# Altium PCB divisor.PcbDoc
Units mm, origin at the board's own origin, x right, y up, seen from the top; angles counter-clockwise.
Board outline 152.4 x 101.6 mm, 2 copper layers (Top Layer, Bottom Layer); 113 components, 230 nets, 687 pads, 101 vias.
Unrouted connection lines stored in the file: 281.
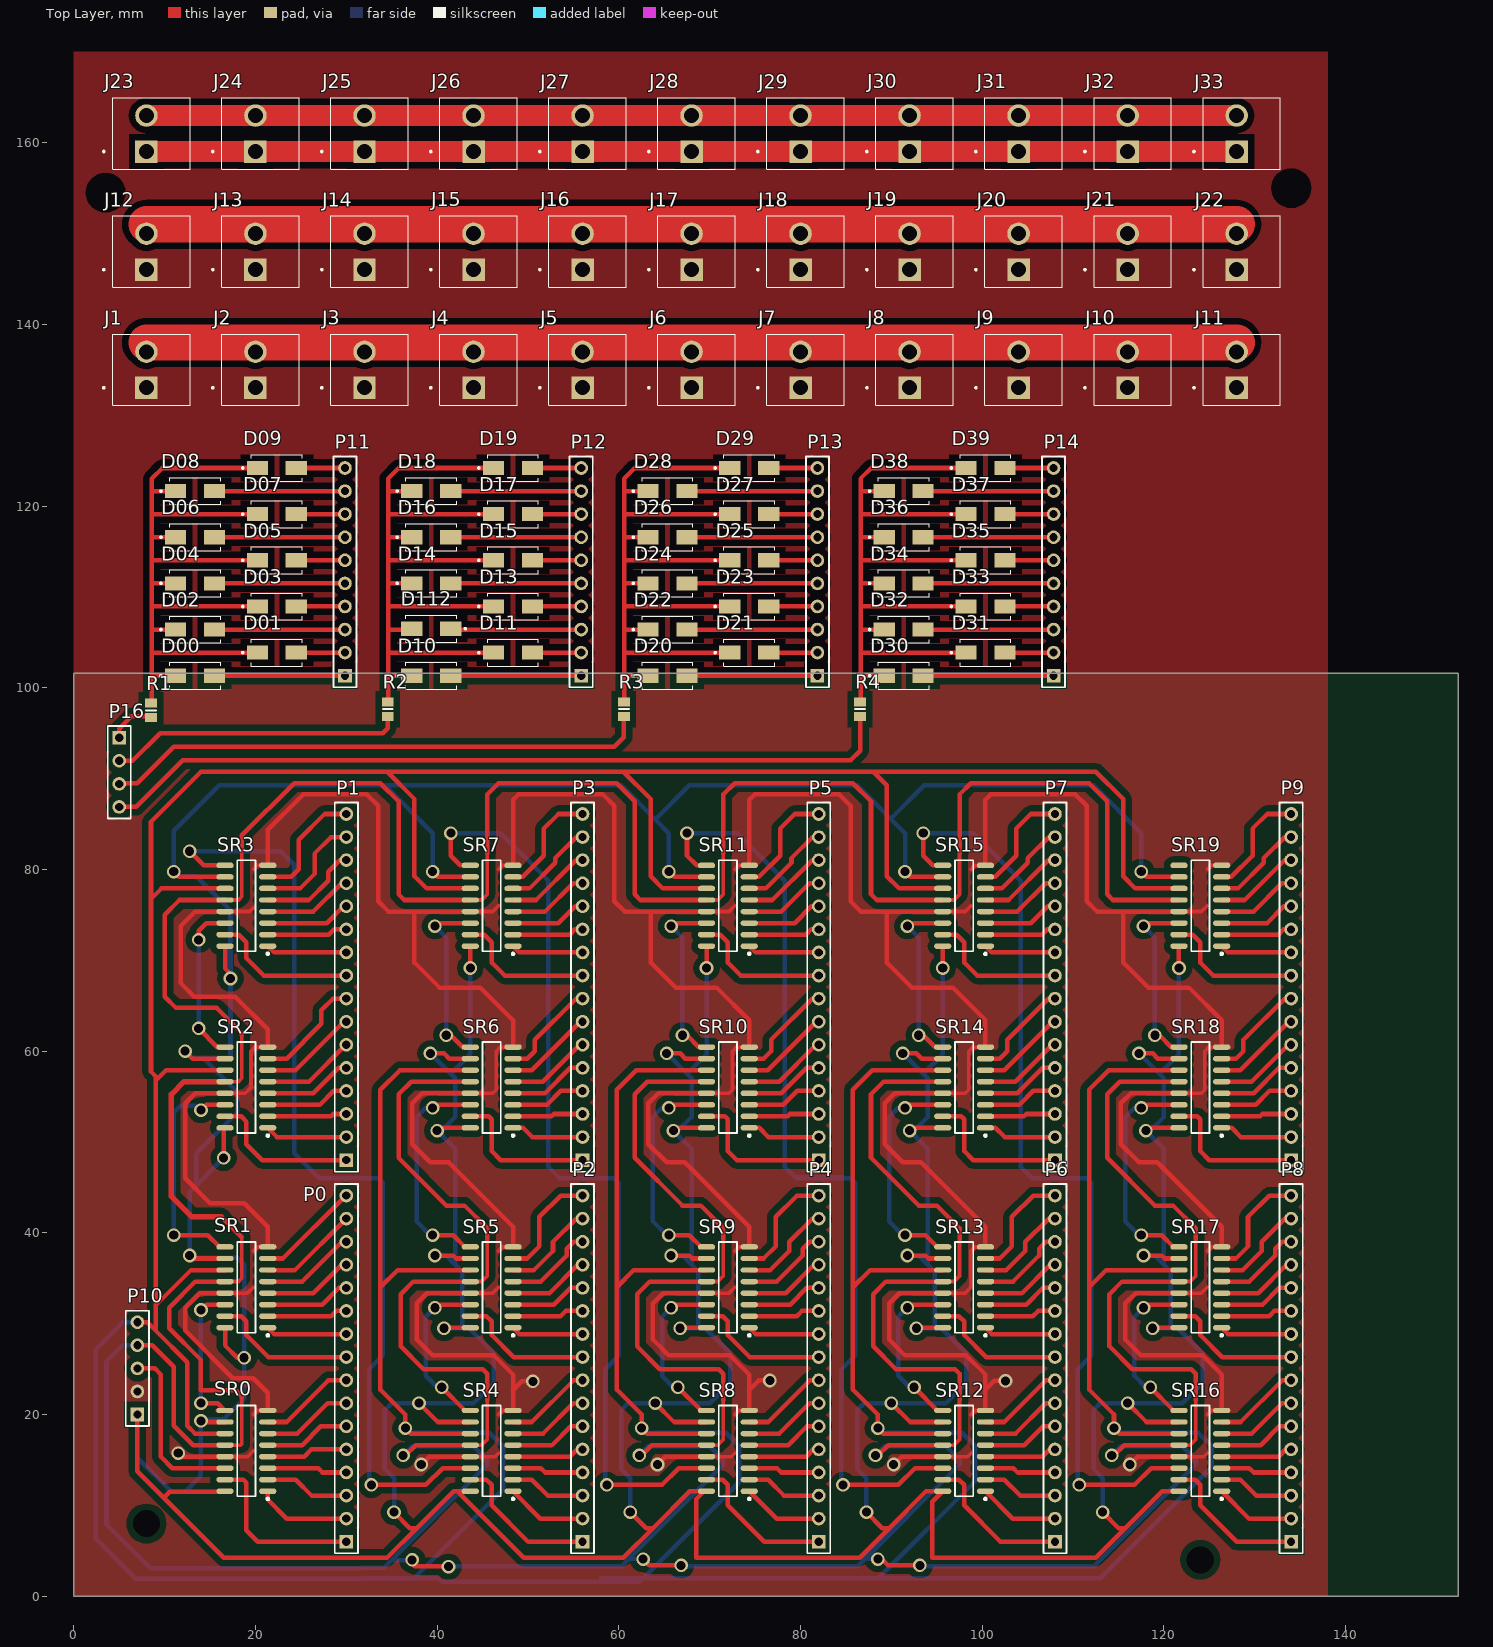
[diagram p0: Top Layer view]
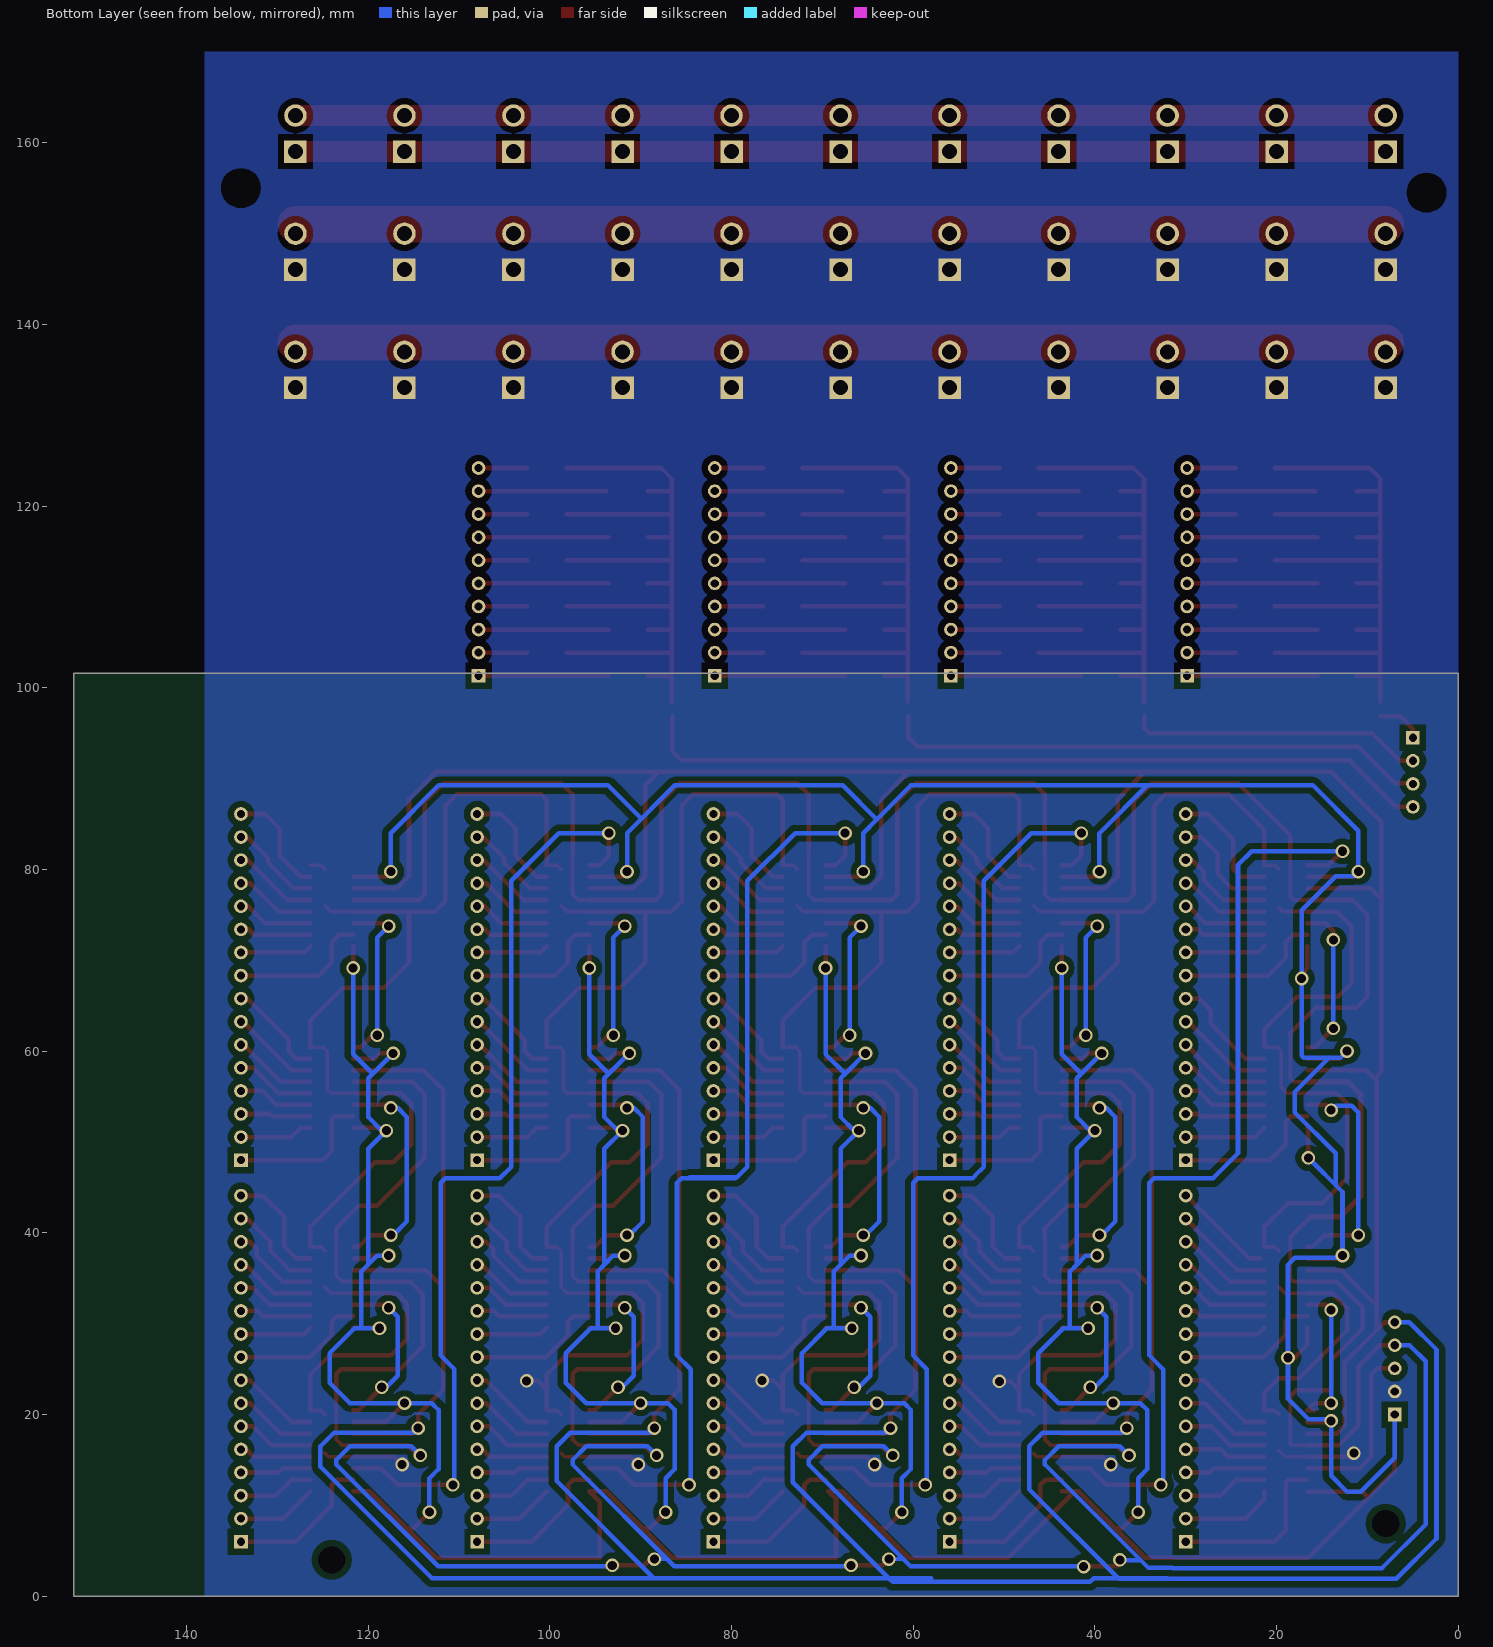
[diagram p1: Bottom Layer view, seen from below]

## Layer stack, top to bottom
Top Solder: solder mask 0.0102, Solder Resist, Dk 3.5
Top Layer: signal copper 0.0356
Dielectric 1: dielectric 0.32, FR-4, Dk 4.8
Bottom Layer: signal copper 0.0356
Bottom Solder: solder mask 0.0102, Solder Resist, Dk 3.5

## Board outline
0,0 152.4,0 152.4,101.6 0,101.6

## Design rules (kind name [scope] priority, off if disabled: settings)
Clearance [All] p1: gap=0.68 ignorepadtopadclearanceinfootprint=FALSE
PolygonConnect [All] p1: connectstyle=Direct reliefconductorwidth=0.254 reliefentries=4 polygonreliefangle="90 Angle" airgapwidth=0.254
RoutingVias [All] p1: holewidth=0.711 width=1.27 viastyle="Through Hole" minholewidth=0.711 minwidth=1.27 maxholewidth=0.711 maxwidth=1.27
SolderMaskExpansion [All] p1: expansion=0.102
Width [All] p1: maxlimit=0.254 minlimit=0.254 preferedwidth=0.254
30 further rules are at their usual default settings.

## Components (designator, comment, footprint, x,y, rotation, side; value= is the part's Value field where it differs from the comment)
D00 "SM120A" *DIOM5227X270N_S1M(Primary) 13.35,101.325 r0 top
D01 "SM120A" *DIOM5227X270N_S1M(Primary) 22.35,103.865 r0 top
D02 "SM120A" *DIOM5227X270N_S1M(Primary) 13.35,106.405 r0 top
D03 "SM120A" *DIOM5227X270N_S1M(Primary) 22.35,108.945 r0 top
D04 "SM120A" *DIOM5227X270N_S1M(Primary) 13.35,111.485 r0 top
D05 "SM120A" *DIOM5227X270N_S1M(Primary) 22.35,114.025 r0 top
D06 "SM120A" *DIOM5227X270N_S1M(Primary) 13.35,116.565 r0 top
D07 "SM120A" *DIOM5227X270N_S1M(Primary) 22.35,119.105 r0 top
D08 "SM120A" *DIOM5227X270N_S1M(Primary) 13.35,121.645 r0 top
D09 "SM120A" *DIOM5227X270N_S1M(Primary) 22.35,124.185 r0 top
D10 "SM120A" *DIOM5227X270N_S1M(Primary) 39.35,101.325 r0 top
D11 "SM120A" *DIOM5227X270N_S1M(Primary) 48.35,103.865 r0 top
D13 "SM120A" *DIOM5227X270N_S1M(Primary) 48.35,108.945 r0 top
D14 "SM120A" *DIOM5227X270N_S1M(Primary) 39.35,111.485 r0 top
D15 "SM120A" *DIOM5227X270N_S1M(Primary) 48.35,114.025 r0 top
D16 "SM120A" *DIOM5227X270N_S1M(Primary) 39.35,116.565 r0 top
D17 "SM120A" *DIOM5227X270N_S1M(Primary) 48.35,119.105 r0 top
D18 "SM120A" *DIOM5227X270N_S1M(Primary) 39.35,121.645 r0 top
D19 "SM120A" *DIOM5227X270N_S1M(Primary) 48.35,124.185 r0 top
D20 "SM120A" *DIOM5227X270N_S1M(Primary) 65.35,101.325 r0 top
D21 "SM120A" *DIOM5227X270N_S1M(Primary) 74.35,103.865 r0 top
D22 "SM120A" *DIOM5227X270N_S1M(Primary) 65.35,106.405 r0 top
D23 "SM120A" *DIOM5227X270N_S1M(Primary) 74.35,108.945 r0 top
D24 "SM120A" *DIOM5227X270N_S1M(Primary) 65.35,111.485 r0 top
D25 "SM120A" *DIOM5227X270N_S1M(Primary) 74.35,114.025 r0 top
D26 "SM120A" *DIOM5227X270N_S1M(Primary) 65.35,116.565 r0 top
D27 "SM120A" *DIOM5227X270N_S1M(Primary) 74.35,119.105 r0 top
D28 "SM120A" *DIOM5227X270N_S1M(Primary) 65.35,121.645 r0 top
D29 "SM120A" *DIOM5227X270N_S1M(Primary) 74.35,124.185 r0 top
D30 "SM120A" *DIOM5227X270N_S1M(Primary) 91.35,101.325 r0 top
D31 "SM120A" *DIOM5227X270N_S1M(Primary) 100.35,103.865 r0 top
D32 "SM120A" *DIOM5227X270N_S1M(Primary) 91.35,106.405 r0 top
D33 "SM120A" *DIOM5227X270N_S1M(Primary) 100.35,108.945 r0 top
D34 "SM120A" *DIOM5227X270N_S1M(Primary) 91.35,111.485 r0 top
D35 "SM120A" *DIOM5227X270N_S1M(Primary) 100.35,114.025 r0 top
D36 "SM120A" *DIOM5227X270N_S1M(Primary) 91.35,116.565 r0 top
D37 "SM120A" *DIOM5227X270N_S1M(Primary) 100.35,119.105 r0 top
D38 "SM120A" *DIOM5227X270N_S1M(Primary) 91.35,121.645 r0 top
D39 "SM120A" *DIOM5227X270N_S1M(Primary) 100.35,124.185 r0 top
D112 "SM120A" *DIOM5227X270N_S1M(Primary) 39.35,106.5 r180 top
J1 "6-1123723-2" *TE_6-1123723-2 8,135 r90 top
J2 "6-1123723-2" *TE_6-1123723-2 20,135 r90 top
J3 "6-1123723-2" *TE_6-1123723-2 32,135 r90 top
J4 "6-1123723-2" *TE_6-1123723-2 44,135 r90 top
J5 "6-1123723-2" *TE_6-1123723-2 56,135 r90 top
J6 "6-1123723-2" *TE_6-1123723-2 68,135 r90 top
J7 "6-1123723-2" *TE_6-1123723-2 80,135 r90 top
J8 "6-1123723-2" *TE_6-1123723-2 92,135 r90 top
J9 "6-1123723-2" *TE_6-1123723-2 104,135 r90 top
J10 "6-1123723-2" *TE_6-1123723-2 116,135 r90 top
J11 "6-1123723-2" *TE_6-1123723-2 128,135 r90 top
J12 "6-1123723-2" *TE_6-1123723-2 8,148 r90 top
J13 "6-1123723-2" *TE_6-1123723-2 20,148 r90 top
J14 "6-1123723-2" *TE_6-1123723-2 32,148 r90 top
J15 "6-1123723-2" *TE_6-1123723-2 44,148 r90 top
J16 "6-1123723-2" *TE_6-1123723-2 56,148 r90 top
J17 "6-1123723-2" *TE_6-1123723-2 68,148 r90 top
J18 "6-1123723-2" *TE_6-1123723-2 80,148 r90 top
J19 "6-1123723-2" *TE_6-1123723-2 92,148 r90 top
J20 "6-1123723-2" *TE_6-1123723-2 104,148 r90 top
J21 "6-1123723-2" *TE_6-1123723-2 116,148 r90 top
J22 "6-1123723-2" *TE_6-1123723-2 128,148 r90 top
J23 "6-1123723-2" *TE_6-1123723-2 8,161 r90 top
J24 "6-1123723-2" *TE_6-1123723-2 20,161 r90 top
J25 "6-1123723-2" *TE_6-1123723-2 32,161 r90 top
J26 "6-1123723-2" *TE_6-1123723-2 44,161 r90 top
J27 "6-1123723-2" *TE_6-1123723-2 56,161 r90 top
J28 "6-1123723-2" *TE_6-1123723-2 68,161 r90 top
J29 "6-1123723-2" *TE_6-1123723-2 80,161 r90 top
J30 "6-1123723-2" *TE_6-1123723-2 92,161 r90 top
J31 "6-1123723-2" *TE_6-1123723-2 104,161 r90 top
J32 "6-1123723-2" *TE_6-1123723-2 116,161 r90 top
J33 "6-1123723-2" *TE_6-1123723-2 128,161 r90 top
P0 "Header 16" HDR1X16 30,6 r90 top
P1 "Header 16" HDR1X16 30,48 r90 top locked
P2 "Header 16" HDR1X16 56,6 r90 top
P3 "Header 16" HDR1X16 56,48 r90 top
P4 "Header 16" HDR1X16 82,6 r90 top
P5 "Header 16" HDR1X16 82,48 r90 top
P6 "Header 16" HDR1X16 108,6 r90 top
P7 "Header 16" HDR1X16 108,48 r90 top
P8 "Header 16" HDR1X16 134,6 r90 top
P9 "Header 16" HDR1X16 134,48 r90 top
P10 "Header 5H" hdr1x5 7,20 r90 top
P11 "Header 10" HDR1X10 29.85,101.325 r90 top
P12 "Header 10" HDR1X10 55.85,101.325 r90 top
P13 "Header 10" HDR1X10 81.85,101.325 r90 top
P14 "Header 10" HDR1X10 107.85,101.325 r90 top
P16 "Header 4" HDR1X4 5,94.5 r270 top
R1 "Res1" 6-0805_L 8.5,97.5 r270 top value=1K
R2 "Res1" 6-0805_L 34.55,97.65 r270 top value=1K
R3 "Res1" 6-0805_L 60.55,97.65 r270 top value=1K
R4 "Res1" 6-0805_L 86.55,97.65 r270 top value=1K
SR0 "74HC595 Shift Register" SO-16_L 19,16 r180 top value=8bit
SR1 "74HC595 Shift Register" SO-16_L 19,34 r180 top value=8bit
SR2 "74HC595 Shift Register" SO-16_L 19,56 r180 top value=8bit
SR3 "74HC595 Shift Register" SO-16_L 19,76 r180 top value=8bit
SR4 "74HC595 Shift Register" SO-16_L 46,16 r180 top value=8bit
SR5 "74HC595 Shift Register" SO-16_L 46,34 r180 top value=8bit
SR6 "74HC595 Shift Register" SO-16_L 46,56 r180 top value=8bit
SR7 "74HC595 Shift Register" SO-16_L 46,76 r180 top value=8bit
SR8 "74HC595 Shift Register" SO-16_L 72,16 r180 top value=8bit
SR9 "74HC595 Shift Register" SO-16_L 72,34 r180 top value=8bit
SR10 "74HC595 Shift Register" SO-16_L 72,56 r180 top value=8bit
SR11 "74HC595 Shift Register" SO-16_L 72,76 r180 top value=8bit
SR12 "74HC595 Shift Register" SO-16_L 98,16 r180 top value=8bit
SR13 "74HC595 Shift Register" SO-16_L 98,34 r180 top value=8bit
SR14 "74HC595 Shift Register" SO-16_L 98,56 r180 top value=8bit
SR15 "74HC595 Shift Register" SO-16_L 98,76 r180 top value=8bit
SR16 "74HC595 Shift Register" SO-16_L 124,16 r180 top value=8bit
SR17 "74HC595 Shift Register" SO-16_L 124,34 r180 top value=8bit
SR18 "74HC595 Shift Register" SO-16_L 124,56 r180 top value=8bit
SR19 "74HC595 Shift Register" SO-16_L 124,76 r180 top value=8bit

## Footprints (in the part's own frame and the unit in brackets; to place one, negate y for a bottom-side part, rotate by r counter-clockwise, add the part's x,y. Pads: shape width x height; smd on the part's side, far side on the other; paste and mask are expansions set on the pad)
6-0805_L [mm] "Chip Resistor, Body 2.0x1.2mm, IPC High Density"
  rect 1x1.3 smd: 1(-0.8,0) 2(0.8,0)
  silkscreen extent 0,-0.55 0,0.55, body extent -1.07,-0.7 1.07,0.7, height 0.7
*DIOM5227X270N_S1M(Primary) [mm]
  rect 2.33x1.56 smd: A(2.14,0) C(-2.14,0)
  silkscreen extent -3.85,-1.48 2.8,1.48
*TE_6-1123723-2 [mm]
  rect 2.475x2.475 hole 1.65: 1(-1.98,0)
  round 2.475 hole 1.65: 2(1.98,0)
  silkscreen extent -3.93,-4.8 3.93,4.8
HDR1X4 [mm] "Connector; Header; 4 Position"
  rect 1.5x1.5 hole 0.9: 1(0,0)
  round 1.5 hole 0.9: 2(2.54,0) 3(5.08,0) 4(7.62,0)
  silkscreen extent -1.27,-1.27 8.89,1.27
hdr1x5 [mm] "Connector; Header; 5 Position"
  rect 1.5x1.5 hole 0.9: 1(0,0)
  round 1.5 hole 0.9: 2(2.54,0) 3(5.08,0) 4(7.62,0) 5(10.16,0)
  silkscreen extent -1.27,-1.27 11.43,1.27
HDR1X10 [mm] "Connector; Header; 10 Position"
  rect 1.5x1.5 hole 0.9: 1(0,0)
  round 1.5 hole 0.9: 2(2.54,0) 3(5.08,0) 4(7.62,0) 5(10.16,0) 6(12.7,0) 7(15.24,0) 8(17.78,0) 9(20.32,0) 10(22.86,0)
  silkscreen extent -1.27,-1.27 24.13,1.27
HDR1X16 [mm] "Connector; Header; 16 Position"
  rect 1.5x1.5 hole 0.9: 1(0,0)
  round 1.5 hole 0.9: 2(2.54,0) 3(5.08,0) 4(7.62,0) 5(10.16,0) 6(12.7,0) 7(15.24,0) 8(17.78,0) 9(20.32,0) 10(22.86,0) 11(25.4,0) 12(27.94,0) 13(30.48,0) 14(33.02,0) 15(35.56,0) 16(38.1,0)
  silkscreen extent -1.27,-1.27 39.37,1.27
SO-16_L [mm] "SOIC, 16-Leads, Body 9.9x3.9mm, Pitch 1.27mm, IPC High Density"
  oval 1.9x0.6 smd: 1(-2.35,4.445) 2(-2.35,3.175) 3(-2.35,1.905) 4(-2.35,0.635) 5(-2.35,-0.635) 6(-2.35,-1.905) 7(-2.35,-3.175) 8(-2.35,-4.445) 9(2.35,-4.445) 10(2.35,-3.175) 11(2.35,-1.905) 12(2.35,-0.635) 13(2.35,0.635) 14(2.35,1.905) 15(2.35,3.175) 16(2.35,4.445)
  silkscreen extent -2.48,-5 1,5.42, body extent -2,-5 2,5, height 1.75

## Part data
D00 D01 D02 D03 D04 D05 D06 D07 D08 D09 D10 D11 D13 D14 D15 D16 D17 D18 D19 D20 D21 D22 D23 D24 D25 D26 D27 D28 D29 D30 D31 D32 D33 D34 D35 D36 D37 D38 D39 D112: library part STPS2L60A, "SCHOTTKY RECTIFIER 2A; Voltage Vrrm: 60V; Diode Case Style: DO-214AC; Case Style: DO-214AC", Package="DO-214 STMicroelectronics", Availability=Unavailable, MF=STMicroelectronics, MP=STPS2L60A, Price=None, SnapEDA_Link=https://www.snapeda.com/parts/STPS2L60A/STMicroelectronics/view-part/?ref=snap
J1 J2 J3 J4 J5 J6 J7 J8 J9 J10 J11 J12 J13 J14 J15 J16 J17 J18 J19 J20 J21 J22 J23 J24 J25 J26 J27 J28 J29 J30 J31 J32 J33: "3.96 EP HDR ASSY 2P_GREEN_", Package=None, Availability=Unavailable, Centerline_Pitch="3.96 mm[.156 in]", EU_RoHS_Compliance=Compliant, MF="TE Connectivity", MP=6-1123723-2, Number_of_Positions=2, Price=None, Product_Type=Header, SnapEDA_Link=https://www.snapeda.com/parts/6-1123723-2/TE%20Connectivity%20AMP%20Connectors/view-part/?ref=snap, TE_purchase_URL=https://www.te.com/usa-en/product-6-1123723-2.html?te_bu=Cor&te_type=disp&te_campaign=seda_glo_cor-seda-global-disp-prtnr-fy19-seda-model-bom-cta_sma-317_1&elqCampaignId=32493
P0 P1 P2 P3 P4 P5 P6 P7 P8 P9: "Header, 16-Pin", LatestRevisionDate=17-Jul-2002, LatestRevisionNote="Re-released for DXP Platform.", Publisher="Altium Limited"
P10: "Header, 5-Pin, Right Angle", LatestRevisionDate=17-Jul-2002, LatestRevisionNote="Re-released for DXP Platform.", Publisher="Altium Limited"
P11 P12 P13 P14: "Header, 10-Pin", LatestRevisionDate=17-Jul-2002, LatestRevisionNote="Re-released for DXP Platform.", Publisher="Altium Limited"
P16: "Header, 4-Pin", LatestRevisionDate=17-Jul-2002, LatestRevisionNote="Re-released for DXP Platform.", Publisher="Altium Limited"
R1 R2 R3 R4: "Resistor", LatestRevisionDate=17-Jul-2002, LatestRevisionNote="Re-released for DXP Platform.", PackageDescription="Axial Device, Thru-Hole; 2 Leads; 0.3 in Pin Spacing", PackageReference=AXIAL-0.3, Published=8-Jun-2000, Publisher="Altium Limited"
SR0 SR1 SR2 SR3 SR4 SR5 SR6 SR7 SR8 SR9 SR10 SR11 SR12 SR13 SR14 SR15 SR16 SR17 SR18 SR19: library part "Res Pack3", "Isolated Resistor Network", Code_IPC=SOIC127P600-16, Code_JEDEC=MS-012-AC, LatestRevisionDate=29-May-2009, LatestRevisionNote="IPC-7351 Footprint Added.", PackageDescription="16-Pin Small Outline Integrated Circuit 1.27 mm Pitch", PackageReference=SO-16, Published=24-Mar-1999, Publisher="Altium Limited"

## Free pads (board coordinates)
  round 1.524 hole 3: 2(134,155) 3(3.5,154.5) 4(8,8) 5(124,4)

## Via types
v1: diameter 1.5, hole 1, Top Layer to Bottom Layer, 99 vias
v2: diameter 1, hole 1, Top Layer to Bottom Layer, 2 vias

## Nets (pads, with @x,y where several pads share a name; then routed paths per layer and width w, separated by ;. In a path a pad name is that pad's centre, name@x,y a point inside that pad or via, vN(x,y) a via of type N, cw(c..) or ccw(c..) an arc to the next point about the centre after c; other vN are vias at no path point)
0_00: P0.1 SR0.15
0_01: P0.2 SR0.1
0_02: P0.3 SR0.2
0_03: P0.4 SR0.3
0_04: P0.5 SR0.4
0_05: P0.6 SR0.5
0_06: P0.7 SR0.6
0_07: P0.8 SR0.7
0_08: P0.9 SR1.15
0_09: P0.10 SR1.1
0_10: P0.11 SR1.2
0_11: P0.12 P1.12 P2.12 P3.12 P4.12 P5.12 P6.12 P9.12 SR1.3 SR3.3 SR5.3 SR7.3 SR9.3 SR11.3 SR13.3 SR19.3
0_12: P0.13 SR1.4 | length 9.9
  Top Layer w0.5: SR1.4 26.365,33.365 29.48,36.48 P0.13
0_NC0: P0.14 SR1.5
0_NC1: P0.15 SR1.6
0_NC2: P0.16 SR1.7
1_00: P1.1 SR2.15
1_01: P1.2 SR2.1
1_02: P1.3 SR2.2
1_03: P1.4 SR2.3
1_04: P1.5 SR2.4
1_05: P1.6 SR2.5
1_06: P1.7 SR2.6
1_07: P1.8 SR2.7
1_08: P1.9 SR3.15
1_09: P1.10 SR3.1
1_10: P1.11 SR3.2
1_12: P1.13 SR3.4 | length 9.9
  Top Layer w0.5: SR3.4 26.365,75.365 29.48,78.48 P1.13
1_NC0: P1.14 SR3.5
1_NC1: P1.15 SR3.6
1_NC2: P1.16 SR3.7
2_00: P2.1 SR4.15
2_01: P2.2 SR4.1
2_02: P2.3 SR4.2
2_03: P2.4 SR4.3
2_04: P2.5 SR4.4
2_05: P2.6 SR4.5
2_06: P2.7 SR4.6
2_07: P2.8 SR4.7 | length 1
  Top Layer w0.5: 55,23.75 P2.8
2_08: P2.9 SR5.15
2_09: P2.10 SR5.1
2_10: P2.11 SR5.2
2_12: P2.13 SR5.4 | length 8.9
  Top Layer w0.5: SR5.4 52.365,33.365 55.48,36.48 P2.13
2_NC0: P2.14 SR5.5
2_NC1: P2.15 SR5.6
2_NC2: P2.16 SR5.7
3_00: P3.1 SR6.15
3_01: P3.2 SR6.1
3_02: P3.3 SR6.2
3_03: P3.4 SR6.3
3_04: P3.5 SR6.4
3_05: P3.6 SR6.5
3_06: P3.7 SR6.6
3_07: P3.8 SR6.7
3_08: P3.9 SR7.15
3_09: P3.10 SR7.1
3_10: P3.11 SR7.2
3_12: P3.13 SR7.4 | length 8.9
  Top Layer w0.5: SR7.4 51.865,75.365 54.98,78.48 P3.13
3_NC0: P3.14 SR7.5
3_NC1: P3.15 SR7.6
3_NC2: P3.16 SR7.7
4_00: P4.1 SR8.15
4_01: P4.2 SR8.1
4_02: P4.3 SR8.2
4_03: P4.4 SR8.3
4_04: P4.5 SR8.4
4_05: P4.6 SR8.5
4_06: P4.7 SR8.6
4_07: P4.8 SR8.7
4_08: P4.9 SR9.15
4_09: P4.10 SR9.1
4_10: P4.11 SR9.2
4_12: P4.13 SR9.4
4_NC0: P4.14 SR9.5
4_NC1: P4.15 SR9.6
4_NC2: P4.16 SR9.7
5_00: P5.1 SR10.15
5_01: P5.2 SR10.1
5_02: P5.3 SR10.2
5_03: P5.4 SR10.3
5_04: P5.5 SR10.4
5_05: P5.6 SR10.5
5_06: P5.7 SR10.6
5_07: P5.8 SR10.7
5_08: P5.9 SR11.15
5_09: P5.10 SR11.1
5_10: P5.11 SR11.2
5_12: P5.13 SR11.4
5_NC0: P5.14 SR11.5
5_NC1: P5.15 SR11.6
5_NC2: P5.16 SR11.7
6_00: P6.1 SR12.15
6_01: P6.2 SR12.1
6_02: P6.3 SR12.2
6_03: P6.4 SR12.3
6_04: P6.5 SR12.4
6_05: P6.6 SR12.5
6_06: P6.7 SR12.6
6_07: P6.8 SR12.7
6_08: P6.9 SR13.15
6_09: P6.10 SR13.1
6_10: P6.11 SR13.2
6_12: P6.13 SR13.4
6_NC0: P6.14 SR13.5
6_NC1: P6.15 SR13.6
6_NC2: P6.16 SR13.7
7_00: SR14.15
7_01: P7.2 SR14.1
7_02: P7.3 SR14.2
7_03: P7.4 SR14.3
7_04: P7.5 SR14.4
7_05: P7.6 SR14.5
7_06: P7.7 SR14.6
7_07: P7.8 SR14.7
7_08: P7.9 SR15.15
7_09: P7.10 SR15.1
7_10: P7.11 SR15.2
7_11: P7.12 SR15.3
7_12: P7.13 SR15.4
7_NC0: P7.14 SR15.5
7_NC1: P7.15 SR15.6
7_NC2: P7.16 SR15.7
8_00: P8.1 SR16.15
8_01: P8.2 SR16.1
8_02: P8.3 SR16.2
8_03: P8.4 SR16.3
8_04: P8.5 SR16.4
8_05: P8.6 SR16.5
8_06: P8.7 SR16.6
8_07: P8.8 SR16.7
8_08: P8.9 SR17.15
8_09: P8.10 SR17.1
8_10: P8.11 SR17.2
8_11: P8.12 SR17.3
8_12: P8.13 SR17.4
8_NC0: P8.14 SR17.5
8_NC1: P8.15 SR17.6
8_NC2: P8.16 SR17.7
9-12: P9.13
9_00: P9.1 SR18.15
9_01: P9.2 SR18.1
9_02: P9.3 SR18.2
9_03: P9.4 SR18.3
9_04: P9.5 SR18.4
9_05: P9.6 SR18.5
9_06: P9.7 SR18.6
9_07: P9.8 SR18.7
9_08: P9.9 SR19.15
9_09: P9.10 SR19.1
9_10: P9.11 SR19.2
9_12: SR19.4
9_NC0: P9.14 SR19.5
9_NC1: P9.15 SR19.6
9_NC2: P9.16 SR19.7
12V: J12.2 J13.2 J14.2 J15.2 J16.2 J17.2 J18.2 J19.2 J20.2 J21.2 J22.2
37_00: P7.1
DriverPin1: J23.2 J24.2 J25.2 J26.2 J27.2 J28.2 J29.2 J30.2 J31.2 J32.2 J33.2
DriverPin2: J23.1 J24.1 J25.1 J26.1 J27.1 J28.1 J29.1 J30.1 J31.1 J32.1 J33.1
DS_8: P10.3 SR0.14 | length 19.5
  Top Layer w0.5: P10.3 8.92,25.08 9.375,24.625 9.595,24.405 9.595,17.845 9.595,15.345 10.845,14.095 SR0.14
GND: J1.1 J2.1 J3.1 J4.1 J5.1 J6.1 J7.1 J8.1 J9.1 J10.1 J11.1 J12.1 J13.1 J14.1 J15.1 J16.1 J17.1 J18.1 J19.1 J20.1 J21.1 J22.1 P10.2 SR0.8 SR0.13 SR1.8 SR1.13 SR2.8 SR2.13 SR3.8 SR3.13 SR4.8 SR4.13 SR5.8 SR5.13 SR6.8 SR6.13 SR7.8 SR7.13 SR8.8 SR8.13 SR9.8 SR9.13 SR10.8 SR10.13 SR11.8 SR11.13 SR12.8 SR12.13 SR13.8 SR13.13 SR14.8 SR14.13 SR15.8 SR15.13 SR16.8 SR16.13 SR17.8 SR17.13 SR18.8 SR18.13 SR19.8 SR19.13 | length 732.7
  Top Layer w0.4: SR0.13 19.115,15.365 19.75,16 ; SR1.13 19.115,33.365 19.75,34 ; SR2.13 18.865,55.365 19.5,56 19.5,60 19.945,60.445 SR2.8 ; SR3.13 19.365,75.365 19.75,75.75 ; 19.75,20 20.195,20.445 SR0.8 ; 19.75,38 20.195,38.445 SR1.8 ; 19.75,80 20.195,80.445 SR3.8 ; SR6.13@43.5,55.365 46.115,55.365 46.5,55.75 46.5,60 46.945,60.445 SR6.8 ; SR4.13 46.365,15.365 46.75,15.75 ; SR5.13 46.115,33.365 46.75,34 ; SR7.13 46.115,75.365 46.75,76 ; 46.75,20 47.195,20.445 SR4.8 ; 46.75,38 47.195,38.445 SR5.8 ; 46.75,80 47.195,80.445 SR7.8 ; SR10.13@69.5,55.365 72.115,55.365 72.5,55.75 72.5,60 72.945,60.445 SR10.8 ; SR8.13 72.365,15.365 72.75,15.75 ; SR9.13 72.115,33.365 72.75,34 ; SR11.13 72.115,75.365 72.75,76 ; 72.75,20 73.195,20.445 SR8.8 ; 72.75,38 73.195,38.445 SR9.8 ; 72.75,80 73.195,80.445 SR11.8 ; SR14.13@95.5,55.365 98.115,55.365 98.5,55.75 98.5,60 98.945,60.445 SR14.8 ; SR12.13 98.365,15.365 98.75,15.75 ; SR13.13 98.115,33.365 98.75,34 98.75,38 99.195,38.445 SR13.8 ; SR15.13 98.115,75.365 98.75,76 ; 98.75,20 99.195,20.445 SR12.8 ; 98.75,80 99.195,80.445 SR15.8 ; SR18.13@121.5,55.365 124.115,55.365 124.5,55.75 124.5,60 124.945,60.445 SR18.8 ; SR16.13 124.365,15.365 124.75,15.75 ; SR17.13 124.115,33.365 124.75,34 ; SR19.13 124.115,75.365 124.75,76 ; 124.75,20 125.195,20.445 SR16.8 ; 124.75,38 125.195,38.445 SR17.8 ; 124.75,80 125.195,80.445 SR19.8
  Top Layer w0.5: v1(11.5,15.75) 11.885,15.365 SR0.13 ; SR1.13 13.865,33.365 12.25,31.75 12.25,29.25 17.5,24 19.75,24 21.35,22.4 SR0.8 ; SR2.13 13.365,55.365 12.25,54.25 12.25,46 15,43.25 18.75,43.25 21.35,40.65 SR1.8 ; SR3.13 13.365,75.365 11.75,73.75 11.75,67.5 13.25,66 17.75,66 21.35,62.4 SR2.8 ; SR3.8 21.35,84.35 25.25,88.25 32.25,88.25 33.5,87 33.5,76.5 34.635,75.365 SR7.13 ; 37.5,75.365 37.5,69.75 40.25,67 44.75,67 48.35,63.4 SR6.8 ; v1(38.25,14.5) 39.115,15.365 SR4.13 ; SR5.13 38.865,33.365 37.75,32.25 37.75,28.25 39.5,26.5 46.25,26.5 48.35,24.4 SR4.8 ; SR6.13 38.365,55.365 37.25,54.25 37.25,49.75 39.25,47.75 41.25,47.75 48.35,40.65 SR5.8 ; 48.325,22.675 49.3,23.65 v1(50.525,23.65) ; SR7.8 48.35,87.65 48.95,88.25 58.25,88.25 59.5,87 59.5,76.5 60.635,75.365 SR11.13 ; 63.5,75.365 63.5,69.75 66.25,67 70.75,67 74.35,63.4 SR10.8 ; v1(64.25,14.5) 65.115,15.365 SR8.13 ; SR9.13 64.865,33.365 63.75,32.25 63.75,28.25 65.5,26.5 72.25,26.5 74.35,24.4 SR8.8 ; SR10.13 64.365,55.365 63.25,54.25 63.25,49.75 65.25,47.75 67.25,47.75 74.35,40.65 SR9.8 ; SR11.8 74.35,87.65 74.95,88.25 ; 74.375,22.725 75.4,23.75 v1(76.625,23.75) ; 84,88.25 74.95,88.25 ; 89.5,75.365 89.5,69.75 92.25,67 96.75,67 100.35,63.4 SR14.8 ; v1(90.25,14.5) 91.115,15.365 SR12.13 ; SR13.13 90.865,33.365 89.75,32.25 89.75,28.25 91.5,26.5 98.25,26.5 100.35,24.4 SR12.8 ; SR14.13 90.365,55.365 89.25,54.25 89.25,49.75 91.25,47.75 93.25,47.75 100.35,40.65 SR13.8 ; SR15.13 86.635,75.365 85.5,76.5 85.5,87 84.25,88.25 74.95,88.25 ; 100.3,22.675 101.325,23.7 v1(102.55,23.7) ; SR15.8 100.35,87.65 100.95,88.25 ; 115.5,75.365 115.5,69.75 118.25,67 122.75,67 126.35,63.4 SR18.8 ; v1(116.25,14.5) 117.115,15.365 SR16.13 ; SR17.13 116.865,33.365 115.75,32.25 115.75,28.25 117.5,26.5 124.25,26.5 126.35,24.4 SR16.8 ; SR18.13 116.365,55.365 115.25,54.25 115.25,49.75 117.25,47.75 119.25,47.75 126.35,40.65 SR17.8 ; SR19.13 112.635,75.365 111.5,76.5 111.5,87 110.25,88.25 100.95,88.25 ; 100.95,88.25 110,88.25 100.95,88.25
NetD00_1: P11.1 | length 14.4
  Top Layer w0.5: 15.49,101.325 P11.1
NetD00_2: D00.A R1.1
NetD01_1: D01.A P11.2 | length 5.4
  Top Layer w0.5: D01.A P11.2
NetD02_1: D02.A P11.3 | length 14.4
  Top Layer w0.5: D02.A P11.3
NetD03_1: D03.A P11.4 | length 5.4
  Top Layer w0.5: D03.A P11.4
NetD04_1: D04.A P11.5 | length 14.4
  Top Layer w0.5: D04.A P11.5
NetD05_1: D05.A P11.6 | length 5.4
  Top Layer w0.5: D05.A P11.6
NetD06_1: D06.A P11.7 | length 14.4
  Top Layer w0.5: D06.A P11.7
NetD07_1: D07.A P11.8 | length 5.4
  Top Layer w0.5: D07.A P11.8
NetD08_1: D08.A P11.9 | length 14.1
  Top Layer w0.5: D08.A@15.77,121.645 P11.9
NetD09_1: D09.A P11.10 | length 5.4
  Top Layer w0.5: D09.A P11.10
NetD10_1: P12.1 | length 14.4
  Top Layer w0.5: 41.49,101.325 P12.1
NetD10_2: D10.A D11.A D13.A D14.A D15.A D16.A D17.A D18.A D19.A R2.1
NetD11_1: P12.2 | length 5.4
  Top Layer w0.5: 50.49,103.865 P12.2
NetD13_1: P12.4 | length 5.4
  Top Layer w0.5: 50.49,108.945 P12.4
NetD14_1: P12.5 | length 14.4
  Top Layer w0.5: 41.49,111.485 P12.5
NetD15_1: P12.6 | length 5.4
  Top Layer w0.5: 50.49,114.025 P12.6
NetD16_1: P12.7 | length 14.4
  Top Layer w0.5: 41.49,116.565 P12.7
NetD17_1: P12.8 | length 5.4
  Top Layer w0.5: 50.49,119.105 P12.8
NetD18_1: P12.9 | length 14.1
  Top Layer w0.5: 41.77,121.645 P12.9
NetD19_1: P12.10 | length 5.4
  Top Layer w0.5: 50.49,124.185 P12.10
NetD20_1: P13.1 | length 14.4
  Top Layer w0.5: 67.49,101.325 P13.1
NetD20_2: D20.A R3.1
NetD21_1: D21.A P13.2 | length 5.4
  Top Layer w0.5: D21.A P13.2
NetD22_1: D22.A P13.3 | length 14.4
  Top Layer w0.5: D22.A P13.3
NetD23_1: D23.A P13.4 | length 5.4
  Top Layer w0.5: D23.A P13.4
NetD24_1: D24.A P13.5 | length 14.4
  Top Layer w0.5: D24.A P13.5
NetD25_1: D25.A P13.6 | length 5.4
  Top Layer w0.5: D25.A P13.6
NetD26_1: D26.A P13.7 | length 14.4
  Top Layer w0.5: D26.A P13.7
NetD27_1: D27.A P13.8 | length 5.4
  Top Layer w0.5: D27.A P13.8
NetD28_1: D28.A P13.9 | length 14.1
  Top Layer w0.5: D28.A@67.77,121.645 P13.9
NetD29_1: D29.A P13.10 | length 5.4
  Top Layer w0.5: D29.A P13.10
NetD30_1: P14.1 | length 14.4
  Top Layer w0.5: 93.49,101.325 P14.1
NetD30_2: D30.A R4.1
NetD31_1: D31.A P14.2 | length 5.4
  Top Layer w0.5: D31.A P14.2
NetD32_1: D32.A P14.3 | length 14.4
  Top Layer w0.5: D32.A P14.3
NetD33_1: D33.A P14.4 | length 5.4
  Top Layer w0.5: D33.A P14.4
NetD34_1: D34.A P14.5 | length 14.4
  Top Layer w0.5: D34.A P14.5
NetD35_1: D35.A P14.6 | length 5.4
  Top Layer w0.5: D35.A P14.6
NetD36_1: D36.A P14.7 | length 14.4
  Top Layer w0.5: D36.A P14.7
NetD37_1: D37.A P14.8 | length 5.4
  Top Layer w0.5: D37.A P14.8
NetD38_1: D38.A P14.9 | length 14.1
  Top Layer w0.5: D38.A@93.77,121.645 P14.9
NetD39_1: D39.A P14.10 | length 5.4
  Top Layer w0.5: D39.A P14.10
NetD112_1: D112.A P12.3 | length 14.4
  Top Layer w0.5: 41.49,106.405 P12.3
NetP16_1: P16.1 R1.2 | length 5.1
  Top Layer w0.5: P16.1 5,95.5 6.35,96.85 R1.2@8.55,96.85
NetP16_2: P16.2 R2.2 | length 32.3
  Top Layer w0.5: P16.2 6.46,91.96 9.5,95 34,95 34.55,95.55 R2.2
NetP16_3: P16.3 R3.2 | length 59.9
  Top Layer w0.5: P16.3@5.08,89.5 7,89.5 11,93.5 59.5,93.5 60.55,94.55 R3.2
NetP16_4: P16.4 R4.2 | length 87.9
  Top Layer w0.5: P16.4 6.88,86.88 12,92 13,92 85.5,92 86.55,93.05 R4.2
SH_CP_11: P10.5 SR0.11 SR1.11 SR2.11 SR3.11 SR4.11 SR5.11 SR6.11 SR7.11 SR8.11 SR9.11 SR10.11 SR11.11 SR12.11 SR13.11 SR14.11 SR15.11 SR16.11 SR17.11 SR18.11 SR19.11 | length 864
  Top Layer w0.5: P10.5 8.09,30.16 9,29.25 ; SR0.11 13.345,17.905 12.5,18.75 12.5,25.75 9,29.25 ; SR1.11 12.905,35.905 9,32 ; SR2.11 10.155,57.905 9,56.75 ; SR3.11 9.655,77.905 8.5,76.75 ; 40,90.75 60.5,90.75 ; SR4.11 37.095,17.905 36.5,18.5 36.5,20 33.75,22.75 33.75,34 ; SR5.11 35.655,35.905 33.75,34 ; SR6.11 35.905,57.905 33.75,55.75 33.75,34 ; SR7.11 38.845,77.905 37.5,79.25 37.5,87.75 34.5,90.75 ; 56.5,90.75 34.5,90.75 ; 66,90.75 88,90.75 ; SR8.11 63.095,17.905 62.5,18.5 62.5,20 59.75,22.75 59.75,34 ; SR9.11 61.655,35.905 59.75,34 ; SR10.11 61.905,57.905 59.75,55.75 59.75,34 ; SR11.11 64.845,77.905 63.5,79.25 63.5,87.75 60.5,90.75 ; SR12.11 89.095,17.905 88.5,18.5 88.5,20 85.75,22.75 85.75,34 ; SR13.11 87.655,35.905 85.75,34 ; SR14.11 87.905,57.905 85.75,55.75 85.75,34 ; SR15.11 90.845,77.905 89.5,79.25 89.5,89.25 88,90.75 ; SR16.11 115.095,17.905 114.5,18.5 114.5,20 111.75,22.75 111.75,34 ; SR17.11 113.655,35.905 111.75,34 ; SR18.11 113.905,57.905 111.75,55.75 111.75,34 ; SR19.11 116.845,77.905 115.5,79.25 115.5,87.75 112.5,90.75 88,90.75 ; 8.5,76.75 8.5,85.25 14,90.75 34.5,90.75 ; 8.5,76.75 8.5,57.75 9,57.25 9,56.75 ; 9,29.25 9,32 ; 9,32 9,56.75 ; 60.5,90.75 88,90.75
  Bottom Layer w0.5: P10.5 5.41,30.16 2.4,27.15 2.4,6.35 6.83,1.92 37.395,1.92 37.45,1.975 ; 32,1.975 37.45,1.975 ; 36.5,18.5 37,18 45.75,18 47.25,16.5 47.25,11.775 37.45,1.975 ; 58,1.975 62.675,1.975 ; 62.5,18.5 63,18 71.75,18 73.25,16.5 73.25,12.55 62.675,1.975 ; 88.5,18.5 89,18 97.75,18 99.25,16.5 99.25,12.675 88.55,1.975 ; 114.5,18.5 115,18 123.75,18 125.25,16.5 125.25,14.25 112.975,1.975 88.55,1.975 ; 37.45,1.975 40.149,1.975 40.554,1.57 62.27,1.57 62.675,1.975 ; 62.675,1.975 88.55,1.975
ST_CP_10: P10.4 SR0.12 SR1.12 SR2.12 SR3.12 SR4.12 SR5.12 SR6.12 SR7.12 SR8.12 SR9.12 SR10.12 SR11.12 SR12.12 SR13.12 SR14.12 SR15.12 SR16.12 SR17.12 SR18.12 SR19.12 | length 682.7
  Top Layer w0: SR3.12@16.535,76.75 SR3.12
  Top Layer w0.4: 13,41.75 13.25,41.75 ; SR0.12 18.385,16.635 18.5,16.75 18.5,21.75 ; SR1.12 18.135,34.635 18.5,35 18.5,39.5 ; SR2.12 18.135,56.635 18.5,57 18.5,61.75 ; SR3.12 18.135,76.635 18.5,77 18.5,82 ; SR7.12 44.885,76.635 45.5,77.25 45.5,81.75 ; SR11.12 70.885,76.635 71.5,77.25 71.5,81.75 ; SR15.12 96.885,76.635 97.5,77.25 97.5,81.75 ; SR16.12 122.885,16.635 123.5,17.25 123.5,21.5 ; SR17.12 122.885,34.635 123.5,35.25 123.5,39.25
  Top Layer w0.5: P10.4 8.65,27.62 11.02,25.25 11.02,18.75 13.135,16.635 SR0.12 ; 16.25,41.75 18.5,39.5 ; SR1.12 13.385,34.635 10.5,31.75 10.5,29.5 14,26 14,22.672 17.828,22.672 18.5,22 18.5,21.75 ; SR3.12 11.635,76.635 10,75 10,66 11.25,64.75 15.75,64.75 18.5,62 18.5,61.75 ; 18.5,82 18.5,83.75 24.25,89.5 33.75,89.5 35.75,87.5 35.75,77.25 36.365,76.635 SR7.12 ; v1@36.875,3.975 37.55,3.3 v1@41.05,3.3 ; 45.5,81.75 45.5,88.25 46.75,89.5 59.75,89.5 ; 50.25,89.5 59.75,89.5 ; 62.675,4.075 63.35,3.4 66.85,3.4 ; SR11.12 62.365,76.635 61.75,77.25 61.75,87.5 59.75,89.5 ; 71.5,81.75 71.5,88.25 72.75,89.5 ; 76.25,89.5 85.75,89.5 ; 85.5,89.5 72.75,89.5 ; v1@88.95,4.075 89.625,3.4 93.125,3.4 ; SR15.12 88.365,76.635 87.75,77.25 87.75,87.5 85.75,89.5 ; 97.5,81.75 97.5,88.25 98.75,89.5 ; 111.5,89.5 98.75,89.5 ; 114.25,15.5 114.5,15.5 115.635,16.635 SR16.12 ; SR17.12 115.385,34.635 114,33.25 114,27.5 116.5,25 123,25 123.5,24.5 123.5,21.5 ; SR18.12 115.135,56.635 113.75,55.25 113.75,48.25 119,43 121,43 123.5,40.5 123.5,39.25 ; SR19.12 114.365,76.635 113.75,77.25 113.75,87.5 111.75,89.5 ; 72.75,89.5 85.75,89.5 ; 98.75,89.5 111.75,89.5 ; 98.75,89.5 111.75,89.5
  Top Layer w0.6: 13,41.75 10.75,44 10.75,55.25 12.135,56.635 SR2.12 ; 13.25,41.75 16.25,41.75
  Bottom Layer w0.5: P10.4 5.37,27.62 3.6,25.85 3.6,7.9 8.4,3.1 31.456,3.1 31.511,3.155 34.155,3.155 45.5,14.5 45.5,15 44,16.5 37.25,16.5 36.25,15.5 ; 35.075,4.05 35.15,3.975 v1@36.875,3.975 ; v1(41.25,3.25) 41.65,3.25 41.7,3.3 60.3,3.3 61.1,4.1 ; 62.25,15.5 63.25,16.5 70,16.5 71.5,15 71.5,14.5 61.1,4.1 ; 62.675,4.075 61.1,4.1 ; 67.05,3.3 86.3,3.3 97.5,14.5 97.5,15 96,16.5 89.25,16.5 88.25,15.5 ; 87.375,4.1 v1@88.95,4.075 ; 93.05,3.3 112.3,3.3 123.5,14.5 123.5,15 122,16.5 115.25,16.5 114.25,15.5
  other v1: 37.25,4 88.5,4.082
TO_SR1: SR0.9 SR1.14
TO_SR2: SR1.9 SR2.14
TO_SR3: SR2.9 SR3.14
TO_SR4: SR3.9 SR4.14 | length 88.9
  Bottom Layer w0.5: 12.75,82 22.75,82 24.25,80.5 24.25,48.75 27,46 33.5,46 34,45.5 34,26.5 32.5,25 32.5,12.5 32.75,12.25
TO_SR5: SR4.9 SR5.14
TO_SR6: SR5.9 SR6.14
TO_SR7: SR6.9 SR7.14
TO_SR8: SR7.9 SR8.14
TO_SR9: SR8.9 SR9.14
TO_SR10: SR9.9 SR10.14
TO_SR11: SR10.9 SR11.14
TO_SR12: SR11.9 SR12.14
TO_SR13: SR12.9 SR13.14
TO_SR14: SR13.9 SR14.14
TO_SR15: SR14.9 SR15.14
TO_SR16: SR15.9 SR16.14
TO_SR17: SR16.9 SR17.14
TO_SR18: SR17.9 SR18.14
TO_SR19: SR18.9 SR19.14
VCC: J1.2 J2.2 J3.2 J4.2 J5.2 J6.2 J7.2 J8.2 J9.2 J10.2 J11.2 P10.1 SR0.10 SR0.16 SR1.10 SR1.16 SR2.10 SR2.16 SR3.10 SR3.16 SR4.10 SR4.16 SR5.10 SR5.16 SR6.10 SR6.16 SR7.10 SR7.16 SR8.10 SR8.16 SR9.10 SR9.16 SR10.10 SR10.16 SR11.10 SR11.16 SR12.10 SR12.16 SR13.10 SR13.16 SR14.10 SR14.16 SR15.10 SR15.16 SR16.10 SR16.16 SR17.10 SR17.16 SR18.10 SR18.16 SR19.10 SR19.16 | length 889.6
  Top Layer w0.5: P10.1 7,13.75 7.938,12.813 9.813,10.938 9.9,10.85 ; SR0.16@16.595,11.5 10.55,11.5 9.9,10.85 ; 35.25,9.25 37,7.5 37.75,7.5 ; 42.675,11.525 42.5,11.35 42.5,11.277 49.527,4.25 60.5,4.25 63.75,7.5 ; SR4.16 41.805,11.555 37.75,7.5 ; 61.25,9.25 63,7.5 63.75,7.5 ; 87.25,9.25 89,7.5 89.75,7.5 ; 113.25,9.25 115,7.5 115.75,7.5 ; SR16.16 119.805,11.555 115.75,7.5 ; 9.9,10.85 16.525,4.225 34.475,4.225 37.75,7.5 ; 63.75,7.5 67.805,11.555 69.355,11.555 68.5,10.7 68.5,4.25 86.5,4.25 89.75,7.5 ; 89.75,7.5 93.805,11.555 SR12.16 94.5,10.405 94.5,4.25 112.5,4.25 115.75,7.5
  Top Layer w4: J1.2@8,138 J11.2@128,138
  Bottom Layer w0.5: P10.1 7,15.25 10.75,11.5 12.25,11.5 14,13.25 14,19.5 16.5,19.5 18.75,21.75 18.75,36.5 18,37.25 13,37.25 ; 12.25,60 13,59.25 14.25,59.25 ; 12.75,37.25 12.75,44.5 16.5,48.25 ; 13.5,45.25 13.5,48.75 18,53.25 18,55.5 14.25,59.25 ; 35.25,9.25 35.25,13 34.25,14 34.25,20.5 35,21.25 44,21.25 46.25,23.5 46.25,26.75 43.5,29.5 42.75,29.5 ; 39.25,59.75 41.5,57.5 ; 39.5,79.75 39.5,84 34.25,89.25 ; 39.75,37.5 41,37.5 42,36.5 ; 40.75,29.5 42.75,29.5 ; 43.65,69.15 43.65,59.65 41.5,57.5 ; 61.25,9.25 61.25,13 60.25,14 60.25,20.5 61,21.25 70,21.25 72.25,23.5 72.25,26.75 69.5,29.5 68.75,29.5 ; 65.25,59.75 67.5,57.5 ; 65.5,79.75 65.5,84 64,85.5 ; 65.75,37.5 67,37.5 68,36.5 ; 66.75,29.5 68.75,29.5 ; 69.65,69.15 69.65,59.65 67.5,57.5 ; 87.25,9.25 87.25,13 86.25,14 86.25,20.5 87,21.25 96,21.25 98.25,23.5 98.25,26.75 95.5,29.5 94.75,29.5 ; 89.95,85.6 93.6,89.25 112.25,89.25 117.5,84 117.5,79.75 ; 91.25,59.75 93.5,57.5 ; 91.5,79.75 91.5,84 86.25,89.25 67.75,89.25 64,85.5 ; 91.75,37.5 93,37.5 94,36.5 ; 92.75,29.5 94.75,29.5 ; 95.65,69.15 95.65,59.65 93.5,57.5 ; 113.25,9.25 113.25,13 112.25,14 112.25,20.5 113,21.25 122,21.25 124.25,23.5 124.25,26.75 121.5,29.5 118.75,29.5 ; 117.25,59.75 120,57 120,52.75 118.5,51.25 118,51.25 120,49.25 120,36.5 ; 117.75,37.5 119,37.5 120.75,35.75 120.75,29.5 ; 119.5,57.5 121.65,59.65 121.65,69.15 ; 14.25,59.25 17,59.25 17.25,59.5 17.25,75.5 13.5,79.25 11.5,79.25 11,79.75 11,84.25 16,89.25 34.25,89.25 ; 34.25,89.25 60.25,89.25 64,85.5 ; 41.5,57.5 42,57 42,52.75 40.5,51.25 40,51.25 42,49.25 42,36.5 ; 42,36.5 42.75,35.75 42.75,29.5 ; 67.5,57.5 68,57 68,52.75 66.5,51.25 66,51.25 68,49.25 68,36.5 ; 68,36.5 68.75,35.75 68.75,29.5 ; 93.5,57.5 94,57 94,52.75 92.5,51.25 92,51.25 94,49.25 94,36.5 ; 94,36.5 94.75,35.75 94.75,29.5
  other v1: 14,19.3
pads on no net: D00.C D01.C D02.C D03.C D04.C D05.C D06.C D07.C D08.C D09.C D10.C D11.C D13.C D14.C D15.C D16.C D17.C D18.C D19.C D20.C D21.C D22.C D23.C D24.C D25.C D26.C D27.C D28.C D29.C D30.C D31.C D32.C D33.C D34.C D35.C D36.C D37.C D38.C D39.C D112.C SR19.9
copper on no net: | length 3347.9
  Top Layer w0.4: 15.805,20.445 16.65,20.445 ; 43.65,16.635 44.885,16.635 45.5,17.25 45.5,21.5 ; 43.65,34.635 44.885,34.635 45.5,35.25 45.5,39.25 ; 69.65,16.635 70.885,16.635 71.5,17.25 71.5,21.5 ; 69.65,34.635 70.885,34.635 71.5,35.25 71.5,39.25 ; 95.65,16.635 96.885,16.635 97.5,17.25 97.5,21.5 ; 95.65,34.635 96.885,34.635 97.5,35.25 97.5,39.25
  Top Layer w0.5: 8.6,98.45 8.6,123.025 9.76,124.185 20.21,124.185 ; 8.625,108.945 20.21,108.945 ; 8.635,103.865 20.21,103.865 ; 8.64,116.565 11.21,116.565 ; 8.65,114.025 20.21,114.025 ; 8.655,106.405 11.21,106.405 ; 8.67,121.645 11.21,121.645 ; 8.685,111.485 11.21,111.485 ; 8.7,101.325 11.21,101.325 ; 8.745,119.105 20.21,119.105 ; v1(11,39.75) 14.75,39.75 16.055,38.445 16.65,38.445 ; v1(11,79.75) 11.575,79.175 16.65,79.175 ; v1(12.25,60) 13.075,59.175 16.65,59.175 ; v1@12.75,37.25 12.825,37.175 16.65,37.175 ; v1(12.75,82) 14.305,80.445 16.65,80.445 ; v1(13.75,62.5) 15.805,60.445 16.65,60.445 ; v1(13.75,72.25) 13.75,73.25 14.595,74.095 16.65,74.095 ; 14,19.5 14.325,19.175 16.65,19.175 ; v1(14,21.25) 15.845,21.25 16.65,20.445 ; v1(14,31.5) 14.595,32.095 16.65,32.095 ; v1(14,53.5) 14.595,54.095 16.65,54.095 ; v1(16.5,48.25) 16.5,51.405 16.65,51.555 ; 16.65,12.825 18.675,12.825 19,12.5 19,7.25 20.25,6 30,6 ; 16.65,29.555 16.65,27.6 18,26.25 v1(18.75,26.25) ; 16.65,30.825 18.425,30.825 19,30.25 19,28.75 21.43,26.32 30,26.32 ; 16.65,52.825 18.425,52.825 19,52.25 19,49.75 20.75,48 30,48 ; 16.65,71.555 16.65,69.1 17.25,68.5 v1(17.25,68) ; 16.65,72.825 18.175,72.825 19,72 19,70.25 20.93,68.32 30,68.32 ; 21.35,11.555 21.35,10.65 23.46,8.54 30,8.54 ; 21.35,12.825 24.425,12.825 26.17,11.08 30,11.08 ; 21.35,14.095 26.895,14.095 27.37,13.62 30,13.62 ; 21.35,15.365 25.365,15.365 26.16,16.16 30,16.16 ; 21.35,16.635 25.135,16.635 27.2,18.7 30,18.7 ; 21.35,17.905 24.595,17.905 27.93,21.24 30,21.24 ; 21.35,19.175 23.425,19.175 28.03,23.78 30,23.78 ; 21.35,29.555 22.045,28.86 30,28.86 ; 21.35,30.825 28.325,30.825 28.9,31.4 30,31.4 ; 21.35,32.095 27.345,32.095 29.19,33.94 30,33.94 ; 21.35,34.635 25.135,34.635 29.52,39.02 30,39.02 ; 21.35,35.905 24.345,35.905 30,41.56 ; 21.35,51.555 22.365,50.54 30,50.54 ; 21.35,52.825 28.325,52.825 28.58,53.08 30,53.08 ; 21.35,54.095 27.095,54.095 28.62,55.62 30,55.62 ; 21.35,55.365 26.365,55.365 29.16,58.16 30,58.16 ; 21.35,56.635 25.885,56.635 29.95,60.7 30,60.7 ; 21.35,57.905 24.405,57.905 29.74,63.24 30,63.24 ; 21.35,59.175 23.425,59.175 27.25,63 27.25,64.5 28.53,65.78 30,65.78 ; 21.35,71.555 22.045,70.86 30,70.86 ; 21.35,72.825 28.075,72.825 28.65,73.4 30,73.4 ; 21.35,74.095 27.845,74.095 29.69,75.94 30,75.94 ; 21.35,76.635 25.885,76.635 28,78.75 28,79.75 29.27,81.02 30,81.02 ; 21.35,77.905 24.905,77.905 26.5,79.5 26.5,81.75 28.31,83.56 30,83.56 ; 21.35,79.175 23.925,79.175 24.75,80 24.75,83.25 27.6,86.1 30,86.1 ; 21.75,37.175 23,37.175 29.925,44.1 30,44.1 ; v1(32.75,12.25) 37,12.25 38.75,12.25 40.595,14.095 43.65,14.095 ; 34.6,98.45 34.6,123.025 35.76,124.185 46.21,124.185 ; 34.625,108.945 46.21,108.945 ; 34.635,103.865 46.21,103.865 ; 34.64,116.565 37.21,116.565 ; 34.65,114.025 46.21,114.025 ; 34.655,106.405 37.21,106.405 ; 34.67,121.645 37.21,121.645 ; 34.685,111.485 37.21,111.485 ; 34.7,101.325 37.21,101.325 ; 34.745,119.105 46.21,119.105 ; v1(36.25,15.5) 36.5,15.5 37.635,16.635 43.65,16.635 ; v1(38,21.25) 40.075,19.175 43.65,19.175 ; v1(39.25,59.75) 40.75,59.75 41.325,59.175 43.65,59.175 ; v1(39.5,39.75) 41.75,39.75 43.055,38.445 43.65,38.445 ; v1(39.5,53.75) 39.845,54.095 43.65,54.095 ; v1(39.5,79.75) 40.075,79.175 43.65,79.175 ; v1(39.75,31.75) 40.095,32.095 43.65,32.095 ; v1(39.75,37.5) 41.75,37.5 42.075,37.175 43.65,37.175 ; v1(39.75,73.75) 40.095,74.095 43.65,74.095 ; v1(40,51.25) 40.305,51.555 43.65,51.555 ; v1(40.5,23) 43.055,20.445 43.65,20.445 ; v1@40.805,29.555 43.65,29.555 ; v1(41,61.75) 41.5,61.75 42.805,60.445 43.65,60.445 ; v1(41.5,84) 41.5,81.5 42.555,80.445 43.65,80.445 ; 43.65,12.825 45.425,12.825 46,12.25 46,10 50,6 56,6 ; 43.65,30.825 45.425,30.825 46,30.25 46,28.75 48.43,26.32 56,26.32 ; 43.65,34.635 37.385,34.635 36,33.25 36,27.5 38.5,25 45,25 45.5,24.5 45.5,21.5 ; 43.65,52.825 45.675,52.825 46,52.5 46,49 47,48 56,48 ; 43.65,56.635 37.135,56.635 35.75,55.25 35.75,48.25 41,43 43,43 45.5,40.5 45.5,39.25 ; v1(43.65,69.15) 43.65,71.555 ; 43.65,72.825 45.175,72.825 46,72 46,69.75 47.43,68.32 56,68.32 ; 48.35,11.555 51.365,8.54 56,8.54 ; 48.35,12.825 50.425,12.825 52.17,11.08 56,11.08 ; 48.35,14.095 51.405,14.095 51.88,13.62 56,13.62 ; 48.35,15.365 54.615,15.365 55.41,16.16 56,16.16 ; 48.35,16.635 52.635,16.635 54.7,18.7 56,18.7 ; 48.35,17.905 51.655,17.905 54.99,21.24 56,21.24 ; 48.35,19.175 50.425,19.175 55,23.75 ; 48.35,29.555 49.045,28.86 56,28.86 ; 48.35,30.825 53.575,30.825 54.15,31.4 56,31.4 ; 48.35,32.095 52.845,32.095 54.69,33.94 56,33.94 ; 48.35,34.635 51.385,34.635 54.25,37.5 54.25,38.25 55.02,39.02 56,39.02 ; 48.35,35.905 50.655,35.905 52.75,38 52.75,39 55.31,41.56 56,41.56 ; 48.35,37.175 49.925,37.175 51.25,38.5 51.25,41.75 53.6,44.1 56,44.1 ; 48.35,51.555 49.445,51.555 50.46,50.54 56,50.54 ; 48.35,52.825 52.575,52.825 52.83,53.08 56,53.08 ; 48.35,54.095 52.095,54.095 53.62,55.62 56,55.62 ; 48.35,55.365 51.865,55.365 54.66,58.16 56,58.16 ; 48.35,56.635 51.635,56.635 55.7,60.7 56,60.7 ; 48.35,57.905 50.405,57.905 55.74,63.24 56,63.24 ; 48.35,59.175 49.925,59.175 50.75,60 50.75,61.25 55.28,65.78 56,65.78 ; 48.35,71.555 49.045,70.86 56,70.86 ; 48.35,72.825 54.575,72.825 55.15,73.4 56,73.4 ; 48.35,74.095 53.345,74.095 55.19,75.94 56,75.94 ; 48.35,76.635 50.885,76.635 55.27,81.02 56,81.02 ; 48.35,77.905 50.155,77.905 53,80.75 53,81.25 55.31,83.56 56,83.56 ; 48.35,79.175 49.425,79.175 51.75,81.5 51.75,84.5 53.35,86.1 56,86.1 ; v1@58.75,12.25 63,12.25 64.75,12.25 66.595,14.095 69.65,14.095 ; 60.6,98.45 60.6,123.025 61.76,124.185 72.21,124.185 ; 60.625,108.945 72.21,108.945 ; 60.635,103.865 72.21,103.865 ; 60.64,116.565 63.21,116.565 ; 60.65,114.025 72.21,114.025 ; 60.655,106.405 63.21,106.405 ; 60.67,121.645 63.21,121.645 ; 60.685,111.485 63.21,111.485 ; 60.7,101.325 63.21,101.325 ; 60.745,119.105 72.21,119.105 ; v1(62.25,15.5) 62.5,15.5 63.635,16.635 69.65,16.635 ; v1(64,21.25) 66.075,19.175 69.65,19.175 ; v1(65.25,59.75) 66.75,59.75 67.325,59.175 69.65,59.175 ; v1(65.5,39.75) 67.75,39.75 69.055,38.445 69.65,38.445 ; v1(65.5,53.75) 65.845,54.095 69.65,54.095 ; v1(65.5,79.75) 66.075,79.175 69.65,79.175 ; v1(65.75,31.75) 66.095,32.095 69.65,32.095 ; v1(65.75,37.5) 67.75,37.5 68.075,37.175 69.65,37.175 ; v1(65.75,73.75) 66.095,74.095 69.65,74.095 ; v1(66,51.25) 66.305,51.555 69.65,51.555 ; v1(66.5,23) 69.055,20.445 69.65,20.445 ; v1@66.805,29.555 69.65,29.555 ; v1(67,61.75) 67.5,61.75 68.805,60.445 69.65,60.445 ; v1(67.5,84) 67.5,81.5 68.555,80.445 69.65,80.445 ; 69.65,12.825 71.425,12.825 72,12.25 72,10 76,6 82,6 ; 69.65,30.825 71.425,30.825 72,30.25 72,28.75 74.43,26.32 82,26.32 ; 69.65,34.635 63.385,34.635 62,33.25 62,27.5 64.5,25 71,25 71.5,24.5 71.5,21.5 ; 69.65,52.825 71.675,52.825 72,52.5 72,49 73,48 82,48 ; 69.65,56.635 63.135,56.635 61.75,55.25 61.75,48.25 67,43 69,43 71.5,40.5 71.5,39.25 ; v1(69.65,69.15) 69.65,71.555 ; 69.65,72.825 71.175,72.825 72,72 72,69.75 73.43,68.32 82,68.32 ; 74.35,11.555 77.365,8.54 82,8.54 ; 74.35,12.825 76.425,12.825 78.17,11.08 82,11.08 ; 74.35,14.095 77.405,14.095 77.88,13.62 82,13.62 ; 74.35,15.365 80.615,15.365 81.41,16.16 82,16.16 ; 74.35,16.635 78.635,16.635 80.7,18.7 82,18.7 ; 74.35,17.905 77.655,17.905 80.99,21.24 82,21.24 ; 74.35,19.175 76.425,19.175 81,23.75 82,23.78 ; 74.35,29.555 75.045,28.86 82,28.86 ; 74.35,30.825 79.575,30.825 80.15,31.4 82,31.4 ; 74.35,32.095 78.845,32.095 80.69,33.94 82,33.94 ; 74.35,33.365 78.365,33.365 81.48,36.48 82,36.48 ; 74.35,34.635 77.385,34.635 80.25,37.5 80.25,38.25 81.02,39.02 82,39.02 ; 74.35,35.905 76.655,35.905 78.75,38 78.75,39 81.31,41.56 82,41.56 ; 74.35,37.175 75.925,37.175 77.25,38.5 77.25,41.75 79.6,44.1 82,44.1 ; 74.35,51.555 75.445,51.555 76.46,50.54 82,50.54 ; 74.35,52.825 78.575,52.825 78.83,53.08 82,53.08 ; 74.35,54.095 78.095,54.095 79.62,55.62 82,55.62 ; 74.35,55.365 77.865,55.365 80.66,58.16 82,58.16 ; 74.35,56.635 77.635,56.635 81.7,60.7 82,60.7 ; 74.35,57.905 76.405,57.905 81.74,63.24 82,63.24 ; 74.35,59.175 75.925,59.175 76.75,60 76.75,61.25 81.28,65.78 82,65.78 ; 74.35,71.555 75.045,70.86 82,70.86 ; 74.35,72.825 80.575,72.825 81.15,73.4 82,73.4 ; 74.35,74.095 79.345,74.095 81.19,75.94 82,75.94 ; 74.35,75.365 77.865,75.365 80.98,78.48 82,78.48 ; 74.35,76.635 76.885,76.635 81.27,81.02 82,81.02 ; 74.35,77.905 76.155,77.905 79,80.75 79,81.25 81.31,83.56 82,83.56 ; 74.35,79.175 75.425,79.175 77.75,81.5 77.75,84.5 79.35,86.1 82,86.1 ; v1@84.75,12.25 89,12.25 90.75,12.25 92.595,14.095 95.65,14.095 ; 86.6,98.45 86.6,123.025 87.76,124.185 98.21,124.185 ; 86.625,108.945 98.21,108.945 ; 86.635,103.865 98.21,103.865 ; 86.64,116.565 89.21,116.565 ; 86.65,114.025 98.21,114.025 ; 86.655,106.405 89.21,106.405 ; 86.67,121.645 89.21,121.645 ; 86.685,111.485 89.21,111.485 ; 86.7,101.325 89.21,101.325 ; 86.745,119.105 98.21,119.105 ; v1(88.25,15.5) 88.5,15.5 89.635,16.635 95.65,16.635 ; v1(90,21.25) 92.075,19.175 95.65,19.175 ; v1(91.25,59.75) 92.75,59.75 93.325,59.175 95.65,59.175 ; v1(91.5,39.75) 93.75,39.75 95.055,38.445 95.65,38.445 ; v1(91.5,53.75) 91.845,54.095 95.65,54.095 ; v1(91.5,79.75) 92.075,79.175 95.65,79.175 ; v1(91.75,31.75) 92.095,32.095 95.65,32.095 ; v1(91.75,37.5) 93.75,37.5 94.075,37.175 95.65,37.175 ; v1(91.75,73.75) 92.095,74.095 95.65,74.095 ; v1(92,51.25) 92.305,51.555 95.65,51.555 ; v1(92.5,23) 95.055,20.445 95.65,20.445 ; v1@92.805,29.555 95.65,29.555 ; v1(93,61.75) 93.5,61.75 94.805,60.445 95.65,60.445 ; v1(93.5,84) 93.5,81.5 94.555,80.445 95.65,80.445 ; 95.65,12.825 97.425,12.825 98,12.25 98,10 102,6 108,6 ; 95.65,30.825 97.425,30.825 98,30.25 98,28.75 100.43,26.32 108,26.32 ; 95.65,34.635 89.385,34.635 88,33.25 88,27.5 90.5,25 97,25 97.5,24.5 97.5,21.5 ; 95.65,52.825 97.675,52.825 98,52.5 98,49 99,48 108,48 ; 95.65,56.635 89.135,56.635 87.75,55.25 87.75,48.25 93,43 95,43 97.5,40.5 97.5,39.25 ; v1(95.65,69.15) 95.65,71.555 ; 95.65,72.825 97.175,72.825 98,72 98,69.75 99.43,68.32 108,68.32 ; 100.35,11.555 103.365,8.54 108,8.54 ; 100.35,12.825 102.425,12.825 104.17,11.08 108,11.08 ; 100.35,14.095 103.405,14.095 103.88,13.62 108,13.62 ; 100.35,15.365 106.615,15.365 107.41,16.16 108,16.16 ; 100.35,16.635 104.635,16.635 106.7,18.7 108,18.7 ; 100.35,17.905 103.655,17.905 106.99,21.24 108,21.24 ; 100.35,19.175 102.425,19.175 107,23.75 108,23.78 ; 100.35,29.555 101.045,28.86 108,28.86 ; 100.35,30.825 105.575,30.825 106.15,31.4 108,31.4 ; 100.35,32.095 104.845,32.095 106.69,33.94 108,33.94 ; 100.35,33.365 104.365,33.365 107.48,36.48 108,36.48 ; 100.35,34.635 103.385,34.635 106.25,37.5 106.25,38.25 107.02,39.02 108,39.02 ; 100.35,35.905 102.655,35.905 104.75,38 104.75,39 107.31,41.56 108,41.56 ; 100.35,37.175 101.925,37.175 103.25,38.5 103.25,41.75 105.6,44.1 108,44.1 ; 100.35,51.555 101.445,51.555 102.46,50.54 108,50.54 ; 100.35,52.825 104.575,52.825 104.83,53.08 108,53.08 ; 100.35,54.095 104.095,54.095 105.62,55.62 108,55.62 ; 100.35,55.365 103.865,55.365 106.66,58.16 108,58.16 ; 100.35,56.635 103.635,56.635 107.7,60.7 108,60.7 ; 100.35,57.905 102.405,57.905 107.74,63.24 108,63.24 ; 100.35,59.175 101.925,59.175 102.75,60 102.75,61.25 107.28,65.78 108,65.78 ; 100.35,71.555 101.045,70.86 108,70.86 ; 100.35,72.825 106.575,72.825 107.15,73.4 108,73.4 ; 100.35,74.095 105.345,74.095 107.19,75.94 108,75.94 ; 100.35,75.365 103.865,75.365 106.98,78.48 108,78.48 ; 100.35,76.635 102.885,76.635 107.27,81.02 108,81.02 ; 100.35,77.905 102.155,77.905 105,80.75 105,81.25 107.31,83.56 108,83.56 ; 100.35,79.175 101.425,79.175 103.75,81.5 103.75,84.5 105.35,86.1 108,86.1 ; v1@110.75,12.25 115,12.25 116.75,12.25 118.595,14.095 121.65,14.095 ; v1(116,21.25) 118.075,19.175 121.65,19.175 ; v1(117.25,59.75) 118.75,59.75 119.325,59.175 121.65,59.175 ; v1(117.5,39.75) 119.75,39.75 121.055,38.445 121.65,38.445 ; v1(117.5,53.75) 117.845,54.095 121.65,54.095 ; v1(117.5,79.75) 118.075,79.175 121.65,79.175 ; v1(117.75,31.75) 118.095,32.095 121.65,32.095 ; v1(117.75,37.5) 119.75,37.5 120.075,37.175 121.65,37.175 ; v1(117.75,73.75) 118.095,74.095 121.65,74.095 ; v1(118,51.25) 118.305,51.555 121.65,51.555 ; v1(118.5,23) 121.055,20.445 121.65,20.445 ; v1@118.805,29.555 121.65,29.555 ; v1(119,61.75) 119.5,61.75 120.805,60.445 121.65,60.445 ; 121.65,12.825 123.425,12.825 124,12.25 124,10 128,6 134,6 ; 121.65,30.825 123.425,30.825 124,30.25 124,28.75 126.43,26.32 134,26.32 ; 121.65,52.825 123.675,52.825 124,52.5 124,49 125,48 134,48 ; v1(121.65,69.15) 121.65,71.555 ; 121.65,72.825 123.175,72.825 124,72 124,69.75 125.43,68.32 134,68.32 ; 126.35,11.555 129.365,8.54 134,8.54 ; 126.35,12.825 128.425,12.825 130.17,11.08 134,11.08 ; 126.35,14.095 129.405,14.095 129.88,13.62 134,13.62 ; 126.35,15.365 132.615,15.365 133.41,16.16 134,16.16 ; 126.35,16.635 130.635,16.635 132.7,18.7 134,18.7 ; 126.35,17.905 129.655,17.905 132.99,21.24 134,21.24 ; 126.35,19.175 128.425,19.175 133,23.75 134,23.78 ; 126.35,29.555 127.045,28.86 134,28.86 ; 126.35,30.825 131.575,30.825 132.15,31.4 134,31.4 ; 126.35,32.095 130.845,32.095 132.69,33.94 134,33.94 ; 126.35,33.365 130.365,33.365 133.48,36.48 134,36.48 ; 126.35,34.635 129.385,34.635 132.25,37.5 132.25,38.25 133.02,39.02 134,39.02 ; 126.35,35.905 128.655,35.905 130.75,38 130.75,39 133.31,41.56 134,41.56 ; 126.35,37.175 127.925,37.175 129.25,38.5 129.25,41.75 131.6,44.1 134,44.1 ; 126.35,51.555 127.445,51.555 128.46,50.54 134,50.54 ; 126.35,52.825 130.575,52.825 130.83,53.08 134,53.08 ; 126.35,54.095 130.095,54.095 131.62,55.62 134,55.62 ; 126.35,55.365 129.865,55.365 132.66,58.16 134,58.16 ; 126.35,56.635 129.635,56.635 133.7,60.7 134,60.7 ; 126.35,57.905 128.405,57.905 133.74,63.24 134,63.24 ; 126.35,59.175 127.925,59.175 128.75,60 128.75,61.25 133.28,65.78 134,65.78 ; 126.35,71.555 127.045,70.86 134,70.86 ; 126.35,72.825 132.575,72.825 133.15,73.4 134,73.4 ; 126.35,74.095 131.345,74.095 133.19,75.94 134,75.94 ; 126.35,75.365 129.865,75.365 132.98,78.48 134,78.48 ; 126.35,76.635 128.885,76.635 133.27,81.02 134,81.02 ; 126.35,77.905 128.155,77.905 131,80.75 131,81.25 133.31,83.56 134,83.56 ; 126.35,79.175 127.425,79.175 129.75,81.5 129.75,84.5 131.35,86.1 134,86.1
  Top Layer w2.3: 8,159.02 128,159.02 ; 8,162.98 128,162.98
  Top Layer w4: 8,151 128,151
  Bottom Layer w0.5: v1(11,39.75) 11,53.25 11.75,54 13.5,54 v1(14,53.5) ; v1(13.75,62.5) v1(13.75,72.25) ; v1(14,21.25) v1(14,31.5) ; v1(39.5,39.75) 39.25,39.75 37.75,41.25 37.75,52.75 38.75,53.75 v1(39.5,53.75) ; v1(39.75,31.75) 38.75,30.75 38.75,24.25 40,23 v1(40.5,23) ; v1(39.75,73.75) 41,72.5 v1(41,61.75) ; v1(41.5,84) 47,84 52.25,78.75 52.25,47.25 53.25,46.25 ; 53.45,46 59.5,46 60,45.5 60,26.5 58.5,25 v1@58.5,12.25 ; v1(65.5,39.75) 65.25,39.75 63.75,41.25 63.75,52.75 64.75,53.75 v1(65.5,53.75) ; v1(65.75,31.75) 64.75,30.75 64.75,24.25 66,23 v1(66.5,23) ; v1(65.75,73.75) 67,72.5 v1(67,61.75) ; v1(67.5,84) 73,84 78.25,78.75 78.25,47.25 79.4,46.1 84.6,46.1 ; 79.6,46 85.5,46 86,45.5 86,26.5 84.5,25 v1@84.5,12.425 ; v1(91.5,39.75) 91.25,39.75 89.75,41.25 89.75,52.75 90.75,53.75 v1(91.5,53.75) ; v1(91.75,31.75) 90.75,30.75 90.75,24.25 92,23 v1(92.5,23) ; v1(91.75,73.75) 93,72.5 v1(93,61.75) ; v1(93.5,84) 99,84 104.25,78.75 104.25,47.25 105.5,46 111.45,46 ; v1@110.5,12.425 110.5,25 112,26.5 112,45.5 111.5,46 ; v1(117.5,39.75) 117.25,39.75 115.75,41.25 115.75,52.75 116.75,53.75 v1(117.5,53.75) ; v1(117.75,31.75) 116.75,30.75 116.75,24.25 118,23 v1(118.5,23) ; v1(117.75,73.75) 119,72.5 v1(119,61.75)
  other v1: 66.85,3.4 93.125,3.4 62.675,4.075 35.25,9.25 61.25,9.25 87.25,9.25 113.25,9.25 58.675,12.25 84.675,12.25 110.675,12.25 114.25,15.5 36.5,18.5 62.5,18.5 88.5,18.5 114.5,18.5 40.75,29.5 66.75,29.5 92.75,29.5 118.75,29.5 12.75,37.5
  other v2: 14,53.5 11,79.75

## Polygon pours and split planes (outlines as drawn)
GND on Bottom Layer "Bottom Layer-GND" (solid, remove dead copper, pour order 0): 0,0 138,0 138,170 0,170
GND on Top Layer "Top Layer-GND" (solid, remove dead copper, pour order 2): 0,0 138,0 138,170 0,170